# EAGLE board pcb_tema (EAGLE 9.7.0)
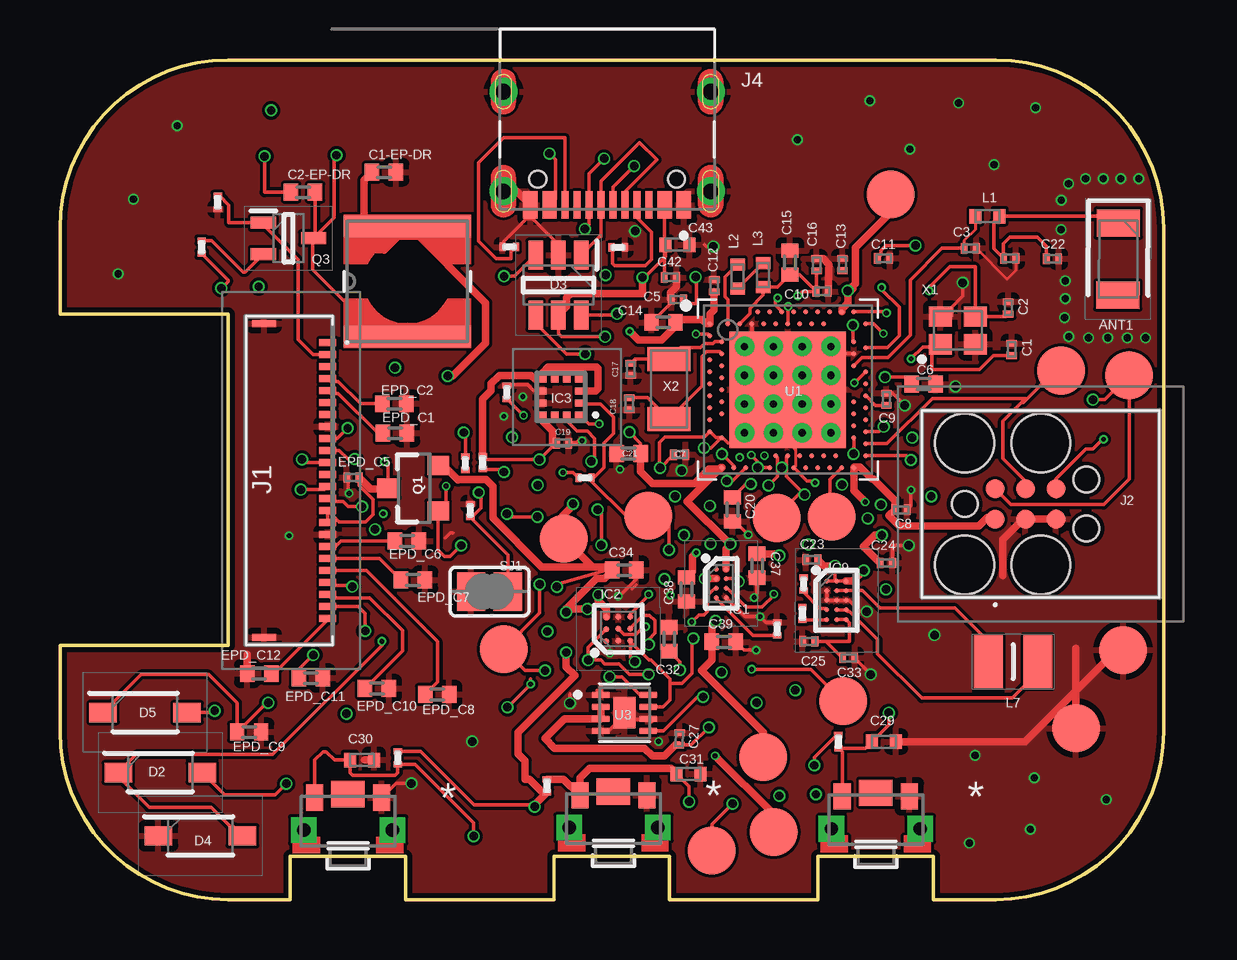
[diagram p0: board, top side]
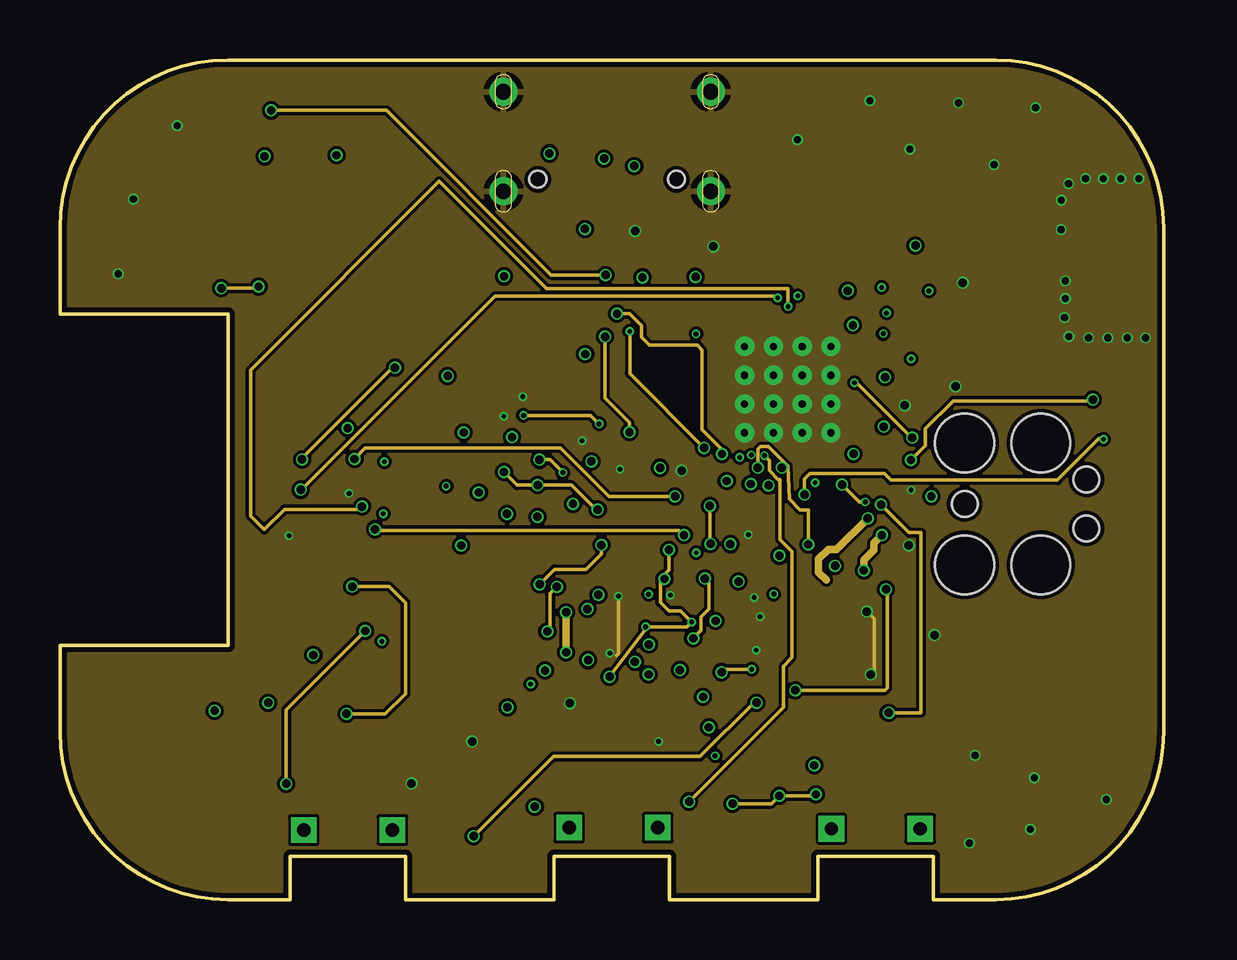
[diagram p1: board, inner layer Route2]
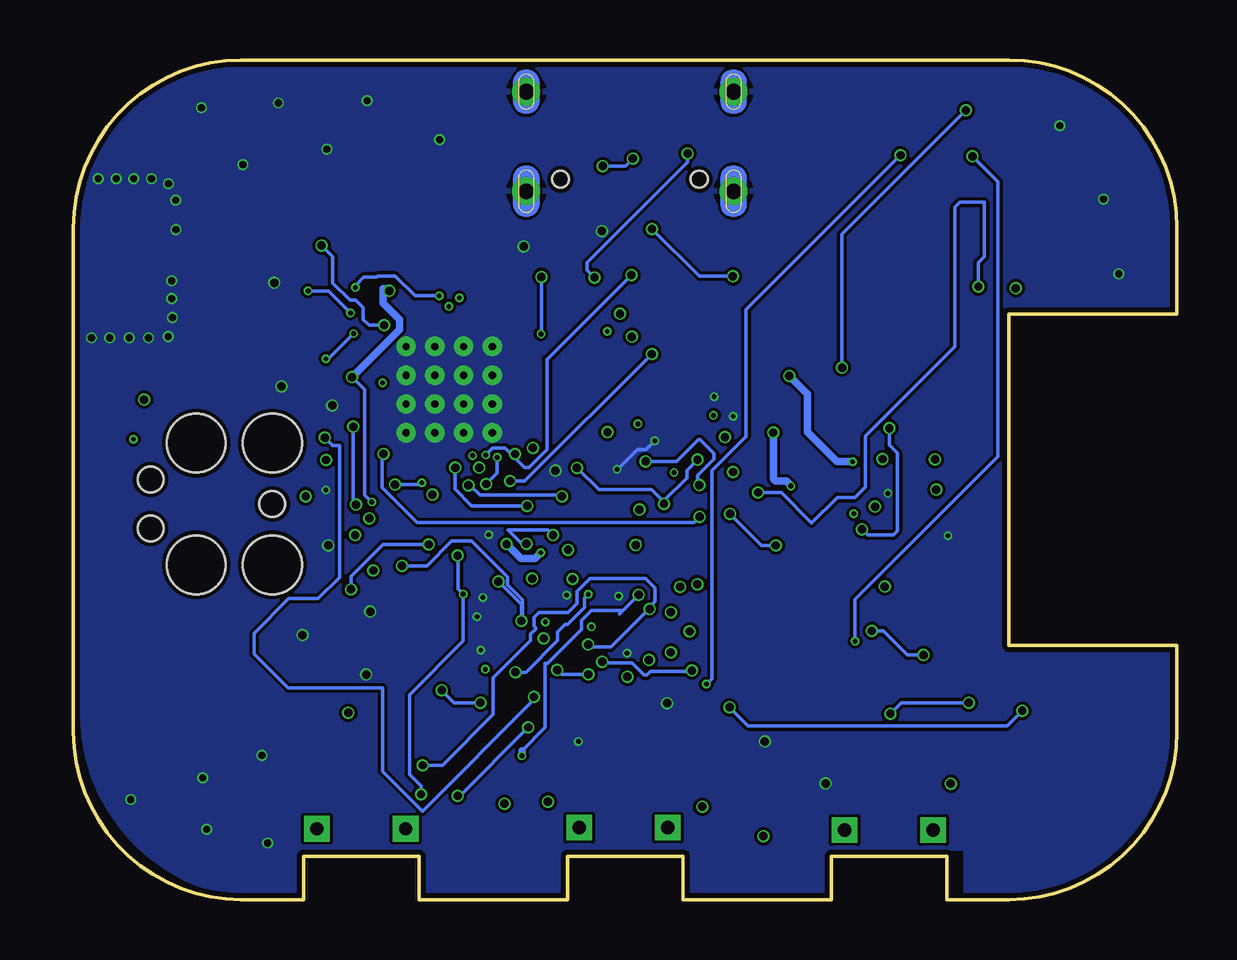
[diagram p2: board, bottom side, seen from below]

Size 46 x 35 mm. Coordinates in mm from the lower left corner, seen from the top.
Outline: 39,0 36.4,0 36.4,1.8 31.6,1.8 31.6,0 25.4,0 25.4,1.8 20.6,1.8 20.6,0 14.4,0 14.4,1.8 9.6,1.8 9.6,0 7,0 arc-90 0,7 0,10.6 7,10.6 7,24.4 0,24.4 0,28 arc-90 7,35 39,35 arc-90 46,28 46,7 arc-90 39,0
Copper layers (1+2*15+16): Top 0.035mm / dielectric 1.6mm / Route2 0.035mm / dielectric 0.15mm / Route15 0.035mm / dielectric 0.2mm / Bottom 0.035mm
Design rules "jlcpcb-2layers.dru *": minimum track width 5mil, minimum drill 0.3mm, track to track 5mil, track to pad 5mil, pad to pad 5mil, via to via 5mil, smd to smd 5mil, copper to edge 0.2mm, drill to drill 6mil, minimum pad ring 10mil, minimum via ring 0.075mm, stop-mask expansion 4mil, vias tented up to drill 0mil, thermal gap 10mil

## Footprints (pad centres in the part's own frame; a part is rotated, then mirrored left to right if it is on the bottom)
2450AT18B100E_ANTC3216X140N = smd 1.15 x 1.8: 1 -1.5,0; 2 1.5,0
NORDIC_NRF_3_RESC0201_L = smd 0.28 x 0.43: 1 -0.255,0; 2 0.255,0
PERFECT_0402_0402 = smd 0.6 x 0.7: 1 -0.5,0; 2 0.5,0
NORDIC_NRF_3_RESC0402_L = smd 0.5 x 0.6: 1 -0.5,0; 2 0.5,0
ESP32_C6_LIBRARY_5_SOD3716X135N = smd 1.15 x 0.8: 1 -1.75,0; 2 1.75,0
ESP32_C6_LIBRARY_3_SOT95P280X145-6N = smd 1.2 x 0.6: 1 -1.25,0.95; 2 -1.25,0; 3 -1.25,-0.95; 4 1.25,-0.95; 5 1.25,0; 6 1.25,0.95
BQ25180YBGR_BGA8C40P2X4_100X155X50 = smd 0.2 x 0.2: A1 -0.2,0.6; A2 0.2,0.6; B1 -0.2,0.2; B2 0.2,0.2; C1 -0.2,-0.2; C2 0.2,-0.2; D1 -0.2,-0.6; D2 0.2,-0.6
DRV2605YZFR_BGA9C50P3X3_144X144X62 = smd 0.25 x 0.25: A1 -0.5,0.5; A2 0,0.5; A3 0.5,0.5; B1 -0.5,0; B2 0,0; B3 0.5,0; C1 -0.5,-0.5; C2 0,-0.5; C3 0.5,-0.5
BMA423_BMA423 = smd 0.3 x 0.35: 1 -0.75,-0.775; 2 -0.25,-0.775; 3 0.25,-0.775; 4 0.75,-0.775; 7 0.75,0.775; 8 0.25,0.775; 9 -0.25,0.775; 10 -0.75,0.775 | smd 0.35 x 0.3: 5 0.775,-0.25; 6 0.775,0.25; 11 -0.775,0.25; 12 -0.775,-0.25
RT6160AWSC_BGA15C40P3X5_140X230X60 = smd 0.216 x 0.216: A1 -0.4,0.8; A2 0,0.8; A3 0.4,0.8; B1 -0.4,0.4; B2 0,0.4; B3 0.4,0.4; C1 -0.4,0; C2 0,0; C3 0.4,0; D1 -0.4,-0.4; D2 0,-0.4; D3 0.4,-0.4; E1 -0.4,-0.8; E2 0,-0.8; E3 0.4,-0.8
503480-2400_5034802400 = smd 0.3 x 0.7: 1 -5.75,1.525; 2 -5.25,1.525; 3 -4.75,1.525; 4 -4.25,1.525; 5 -3.75,1.525; 6 -3.25,1.525; 7 -2.75,1.525; 8 -2.25,1.525; 9 -1.75,1.525; 10 -1.25,1.525; 11 -0.75,1.525; 12 -0.25,1.525; 13 0.25,1.525; 14 0.75,1.525; 15 1.25,1.525; 16 1.75,1.525; 17 2.25,1.525; 18 2.75,1.525; 19 3.25,1.525; 20 3.75,1.525; 21 4.25,1.525; 22 4.75,1.525; 23 5.25,1.525; 24 5.75,1.525 | smd 0.3 x 1: MP1 -6.54,-1.125; MP2 6.54,-1.125
TC2030-IDC_TC2030IDC = smd 0.783 x 0.783: 1 -0.953,-0.635; 2 -0.953,0.635; 3 0.317,-0.635; 4 0.317,0.635; 5 1.588,-0.635; 6 1.588,0.635 | hole 2.451: -2.223,-2.54; -2.223,2.54; 0.952,-2.54; 0.952,2.54 | hole 1.067: -2.223,0; 2.857,-1.016; 2.857,1.016
KH-TYPE-C-16P_KINGHELM_KH-TYPE-C-16P = smd 0.6 x 1.15: A1_B12 -3.2,4.725; A4_B9 -2.4,4.725; A9_B4 2.4,4.725; A12_B1 3.2,4.725 | smd 0.3 x 1.15: A5 -1.25,4.725; A6 -0.25,4.725; A7 0.25,4.725; A8 1.25,4.725; B5 1.75,4.725; B6 0.75,4.725; B7 -0.75,4.725; B8 -1.75,4.725 | drill 0.65 pad 1.05: SH1 -4.32,0; SH2 4.32,0; SH3 -4.32,4.15; SH4 4.32,4.15 | hole 0.7: -2.89,3.65; 2.89,3.65
NORDIC_NRF_2_RESC0402_L = smd 0.5 x 0.6: 1 -0.5,0; 2 0.5,0
ESP32_C6_LIBRARY_2_IND_4828-WE-TPC_WRE = smd 0.9 x 5.3: 1 -2.286,0; 2 2.286,0
MLP2016SR47MT0S1_INDC2016X100N = smd 1.2 x 2.2: 1 -1.028,0; 2 1.028,0
ESP32_C6_LIBRARY_4_ESP32_C6_LIBRARY_4_ESP32_C6_LIBRARY_4_ESP32_C6_LIBRARY_4_ESP32_WROVER_SPARKFUN-DISCRETESEMI_SOT23-3 = smd 0.8 x 0.9: 1 -0.95,-1; 2 0.95,-1; 3 0,1.1
ESP32_C6_LIBRARY_6_SOT65P210X110-3N = smd 1.05 x 0.5: 1 -1.05,0.65; 2 -1.05,-0.65; 3 1.05,0
CPF0201D7K68C1_0201 = smd 0.35 x 0.25: 1 0,0.275; 2 0,-0.275
ESP32_C6_LIBRARY_7_JUMPER_SJ = smd 1.168 x 1.6: 1 -0.762,0; 2 0.762,0
2025-10-22_07-23-44_LIBRARY_SW_EVP-AKE31A_PAN = smd 0.711 x 1.092: 1 -1.4,-0.972; 2 1.4,-0.972 | drill 0.559 pad 0.914 square: 3 -1.848,0.381; 4 1.848,0.381 | smd 1.397 x 1.092: 5 0,-1.124
HECTOR_WATCH_1_TP20R = smd 2 x 2: TP 0,0
NORDIC_NRF_4_AQFN50P700X700X85_HS-74N = smd 4.85 x 4.85: P$74 0,0 | drill 0.3 pad 0.6: P$75 -1.8,1.8; P$76 -0.6,1.8; P$77 0.6,1.8; P$78 1.8,1.8; P$79 -1.8,0.6; P$80 -0.6,0.6; P$81 0.6,0.6; P$82 1.8,0.6; P$83 -1.8,-0.6; P$84 -0.6,-0.6; P$85 0.6,-0.6; P$86 1.8,-0.6; P$87 -1.8,-1.8; P$88 -0.6,-1.8; P$89 0.6,-1.8; P$90 1.8,-1.8 | smd 0.2 x 0.2: P$A8 -1.25,3.25; P$A10 -0.75,3.25; P$A12 -0.25,3.25; P$A14 0.25,3.25; P$A16 0.75,3.25; P$A18 1.25,3.25; P$A20 1.75,3.25; P$A22 2.25,3.25; P$A23 2.75,3.25; P$AA24 3.25,-2.25; P$AB2 -2.75,-2.5; P$AC5 -2,-2.75; P$AC9 -1,-2.75; P$AC11 -0.5,-2.75; P$AC13 0,-2.75; P$AC15 0.5,-2.75; P$AC17 1,-2.75; P$AC19 1.5,-2.75; P$AC21 2,-2.75; P$AC24 3.25,-2.75; P$AD2 -2.75,-3.25; P$AD4 -2.25,-3.25; P$AD6 -1.75,-3.25; P$AD8 -1.25,-3.25; P$AD10 -0.75,-3.25; P$AD12 -0.25,-3.25; P$AD14 0.25,-3.25; P$AD16 0.75,-3.25; P$AD18 1.25,-3.25; P$AD20 1.75,-3.25; P$AD22 2.25,-3.25; P$AD23 2.75,-3.25; P$B1 -3.25,2.75; P$B3 -2.5,2.75; P$B5 -2,2.75; P$B7 -1.5,2.75; P$B9 -1,2.75; P$B11 -0.5,2.75; P$B13 0,2.75; P$B15 0.5,2.75; P$B17 1,2.75; P$B19 1.5,2.75; P$B24 3.25,2.75; P$C1 -3.25,2.25; P$D2 -2.75,2; P$D23 2.75,2; P$E24 3.25,1.75; P$F2 -2.75,1.5; P$F23 2.75,1.5; P$G1 -3.25,1.25; P$H2 -2.75,1; P$H23 2.75,1; P$J1 -3.25,0.75; P$J24 3.25,0.75; P$K2 -2.75,0.5; P$L1 -3.25,0.25; P$L24 3.25,0.25; P$M2 -2.75,0; P$N1 -3.25,-0.25; P$N24 3.25,-0.25; P$P2 -2.75,-0.5; P$P23 2.75,-0.5; P$R1 -3.25,-0.75; P$R24 3.25,-0.75; P$T2 -2.75,-1; P$T23 2.75,-1; P$U1 -3.25,-1.25; P$U24 3.25,-1.25; P$V23 2.75,-1.5; P$W1 -3.25,-1.75; P$W24 3.25,-1.75; P$Y2 -2.75,-2; P$Y23 2.75,-2
ESP32_C6_LIBRARY_SON50P200X200X80-9N = smd 0.76 x 0.27: 1 -0.985,0.75; 2 -0.985,0.25; 3 -0.985,-0.25; 4 -0.985,-0.75; 5 0.985,-0.75; 6 0.985,-0.25; 7 0.985,0.25; 8 0.985,0.75 | smd 0.9 x 1.3: 9 0,0
NORDIC_NRF_BT-XTAL_2016_N = smd 0.95 x 0.85: 1 -0.725,-0.575; 2 0.725,-0.575; 3 0.725,0.575; 4 -0.725,0.575
NORDIC_NRF_1_XTAL_3215_N = smd 1 x 1.8: 1 -1.25,0; 2 1.25,0

## Placement (x,y rotation side)
ANT1  2450AT18B100E  [2450AT18B100E_ANTC3216X140N]  44.11,26.7 269.7 top
C1  12pF  [NORDIC_NRF_3_RESC0201_L]  39.67,22.93 90 top
C1-EP-DR  10uF  [PERFECT_0402_0402]  13.5,30.32 0 top
C2  12pF  [NORDIC_NRF_3_RESC0201_L]  39.53,24.66 90 top
C2-EP-DR  4.7uF/25V  [PERFECT_0402_0402]  10.13,29.49 0 top
C3  1pF  [NORDIC_NRF_3_RESC0201_L]  37.94,27.15 0 top
C4  1pF  [NORDIC_NRF_3_RESC0201_L]  39.59,26.73 0 top
C5  100nF  [NORDIC_NRF_3_RESC0201_L]  25.74,25.01 180 top
C6  4.7µF  [PERFECT_0402_0402]  36,21.5 0 top
C7  100nF  [NORDIC_NRF_3_RESC0201_L]  25.82,18.55 0 top
C8  100nF  [NORDIC_NRF_3_RESC0201_L]  35.06,16.24 0 top
C9  820pF  [NORDIC_NRF_3_RESC0201_L]  34.45,20.85 90 top
C10  N.C.  [NORDIC_NRF_3_RESC0201_L]  31.77,25.35 0 top
C11  100pF  [NORDIC_NRF_3_RESC0201_L]  34.33,26.73 0 top
C12  100nF  [NORDIC_NRF_3_RESC0201_L]  27.27,25.59 90 top
C13  N.C.  [NORDIC_NRF_3_RESC0201_L]  32.62,26.47 90 top
C14  4.7µF  [PERFECT_0402_0402]  25.16,24.06 180 top
C15  1.0µF  [PERFECT_0402_0402]  30.43,26.55 90 top
C16  47nF  [NORDIC_NRF_3_RESC0201_L]  31.54,26.46 90 top
C17  12pF  [NORDIC_NRF_3_RESC0201_L]  23.79,22.1 90 top
C18  12pF  [NORDIC_NRF_3_RESC0201_L]  23.73,20.67 90 top
C19  100nF  [NORDIC_NRF_3_RESC0201_L]  20.95,19.03 0 top
C20  4.7µF  [PERFECT_0402_0402]  28.03,16.26 269.8 top
C21  4.7µF  [PERFECT_0402_0402]  23.7,18.59 180 top
C22  N.C.  [NORDIC_NRF_3_RESC0201_L]  41.37,26.71 0 top
C23  0.1uF  [NORDIC_NRF_3_RESC0201_L]  31.34,14.17 0 top
C24  10uF  [NORDIC_NRF_3_RESC0201_L]  34.44,14.03 0 top
C25  22uF  [NORDIC_NRF_3_RESC0201_L]  31.21,10.76 179.7 top
C27  0.1uF  [NORDIC_NRF_3_RESC0201_L]  25.82,6.7 88.1 top
C29  1uF  [NORDIC_NRF_3_RESC0402_L]  34.35,6.58 180 top
C30  1uF  [NORDIC_NRF_3_RESC0402_L]  12.58,5.82 180 top
C31  1uF  [NORDIC_NRF_3_RESC0402_L]  26.2,5.23 180 top
C32  1uF  [PERFECT_0402_0402]  25.39,10.86 90 top
C33  22uF  [NORDIC_NRF_3_RESC0201_L]  32.88,10.07 0 top
C34  0.1uF  [PERFECT_0402_0402]  23.51,13.73 0 top
C37  1uF  [PERFECT_0402_0402]  29.06,13.91 90.1 top
C38  1uF  [PERFECT_0402_0402]  26.11,12.93 90 top
C39  10uF  [PERFECT_0402_0402]  27.67,10.75 0 top
C42  0.1uF  [NORDIC_NRF_3_RESC0201_L]  25.45,25.93 0 top
C43  4.7uF  [NORDIC_NRF_3_RESC0402_L]  25.74,27.29 0 top
D2  MBR0530  [ESP32_C6_LIBRARY_5_SOD3716X135N]  4.18,5.29 0 top
D3  USBLC6-2SC6Y  [ESP32_C6_LIBRARY_3_SOT95P280X145-6N]  20.78,25.61 270 top
D4  MBR0530  [ESP32_C6_LIBRARY_5_SOD3716X135N]  5.85,2.66 0 top
D5  MBR0530  [ESP32_C6_LIBRARY_5_SOD3716X135N]  3.55,7.8 0 top
EPD_C1  1uF/50V  [PERFECT_0402_0402]  13.96,19.44 0 top
EPD_C2  1uF/50V  [PERFECT_0402_0402]  13.94,20.67 0 top
EPD_C5  0.1uF/50V  [NORDIC_NRF_3_RESC0201_L]  12.21,17.59 0 top
EPD_C6  1uF/50V  [PERFECT_0402_0402]  14.46,14.95 0 top
EPD_C7  1uF/50V  [PERFECT_0402_0402]  14.72,13.32 0 top
EPD_C8  1uF/50V  [PERFECT_0402_0402]  15.73,8.55 0 top
EPD_C9  1uF/50V  [PERFECT_0402_0402]  7.88,6.99 0 top
EPD_C10  1uF/50V  [PERFECT_0402_0402]  13.21,8.81 0 top
EPD_C11  1uF/50V  [PERFECT_0402_0402]  10.46,9.23 0 top
EPD_C12  1uF/50V  [PERFECT_0402_0402]  8.31,9.42 180 top
IC1  BQ25180YBGR  [BQ25180YBGR_BGA8C40P2X4_100X155X50]  27.56,13.18 0 top
IC2  DRV2605YZFR  [DRV2605YZFR_BGA9C50P3X3_144X144X62]  23.27,11.28 90.4 top
IC3  BMA421  [BMA423_BMA423]  20.88,20.95 90 top
IC9  RT6160AWSC  [RT6160AWSC_BGA15C40P3X5_140X230X60]  32.37,12.48 0 top
J1  503480-2400  [503480-2400_5034802400]  9.63,17.47 270 top
J2  TC2030-IDC  [TC2030-IDC_TC2030IDC]  39.93,16.49 0 top
J4  KH-TYPE-C-16P  [KH-TYPE-C-16P_KINGHELM_KH-TYPE-C-16P]  22.81,33.68 180 top
L1  3.9nH  [NORDIC_NRF_2_RESC0402_L]  38.66,28.48 0 top
L2  10µH  [NORDIC_NRF_2_RESC0402_L]  28.25,25.98 90 top
L3  15nH  [NORDIC_NRF_2_RESC0402_L]  29.31,26.03 90 top
L5  68uH  [ESP32_C6_LIBRARY_2_IND_4828-WE-TPC_WRE]  14.48,25.77 90 top
L7  FTC252012SR47MBCA  [MLP2016SR47MT0S1_INDC2016X100N]  39.73,9.92 0 top
Q1  20V/4.2A/52mΩ/1.4W  [ESP32_C6_LIBRARY_4_ESP32_C6_LIBRARY_4_ESP32_C6_LIBRARY_4_ESP32_C6_LIBRARY_4_ESP32_WROVER_SPARKFUN-DISCRETESEMI_SOT23-3]  14.77,17.15 90 top
Q3  SI1308EDL-T1-GE3  [ESP32_C6_LIBRARY_6_SOT65P210X110-3N]  9.53,27.56 0 top
R1_EP_DR  0.47  [CPF0201D7K68C1_0201]  5.91,27.19 180 top
R1_USB  5K1  [CPF0201D7K68C1_0201]  23.27,27.18 270 top
R2  0  [CPF0201D7K68C1_0201]  30.95,11.93 0 top
R2_EP_DR  10K  [CPF0201D7K68C1_0201]  6.58,29.07 180 top
R2_USB  5K1  [CPF0201D7K68C1_0201]  18.73,27.2 270 top
R3  0  [CPF0201D7K68C1_0201]  18.62,21.15 0 top
R4  0  [CPF0201D7K68C1_0201]  31,13.16 0 top
R5  10k  [CPF0201D7K68C1_0201]  14.08,5.9 180 top
R7  10k  [CPF0201D7K68C1_0201]  32.45,6.58 180.1 top
R8  10k  [CPF0201D7K68C1_0201]  20.3,4.74 0 top
R9  10K  [CPF0201D7K68C1_0201]  29.9,11.28 0 top
R17  3K3  [CPF0201D7K68C1_0201]  17.62,18.22 0 top
R18  3K3  [CPF0201D7K68C1_0201]  21.88,17.59 91 top
R_PWR_EPD  10K  [CPF0201D7K68C1_0201]  16.9,18.19 0 top
R_TYPE_SEL  2.2  [CPF0201D7K68C1_0201]  17.11,16.22 0 top
SJ1  [ESP32_C6_LIBRARY_7_JUMPER_SJ]  17.9,12.84 0 top
SW_DN  2025-10-22_07-23-44_LIBRARY_EVP-AKE31ASW_EVP-AKE31A_PAN  [2025-10-22_07-23-44_LIBRARY_SW_EVP-AKE31A_PAN]  34,3.33 180 top
SW_ENT  2025-10-22_07-23-44_LIBRARY_EVP-AKE31ASW_EVP-AKE31A_PAN  [2025-10-22_07-23-44_LIBRARY_SW_EVP-AKE31A_PAN]  23.07,3.37 180 top
SW_UP  2025-10-22_07-23-44_LIBRARY_EVP-AKE31ASW_EVP-AKE31A_PAN  [2025-10-22_07-23-44_LIBRARY_SW_EVP-AKE31A_PAN]  12.01,3.27 180 top
TP_3.3V  HECTOR_WATCH_1_TPTP20R  [HECTOR_WATCH_1_TP20R]  21.01,15.04 0 top
TP_3V3  HECTOR_WATCH_1_TPTP20R  [HECTOR_WATCH_1_TP20R]  34.63,29.39 0 top
TP_BAT_GND  HECTOR_WATCH_1_TPTP20R  [HECTOR_WATCH_1_TP20R]  42.35,7.14 0 top
TP_GND  HECTOR_WATCH_1_TPTP20R  [HECTOR_WATCH_1_TP20R]  44.32,10.4 0 top
TP_ON  HECTOR_WATCH_1_TPTP20R  [HECTOR_WATCH_1_TP20R]  32.64,8.27 0 top
TP_OP  HECTOR_WATCH_1_TPTP20R  [HECTOR_WATCH_1_TP20R]  29.75,2.81 0 top
TP_RESET  HECTOR_WATCH_1_TPTP20R  [HECTOR_WATCH_1_TP20R]  29.88,15.91 0 top
TP_SCL  HECTOR_WATCH_1_TPTP20R  [HECTOR_WATCH_1_TP20R]  18.49,10.44 0 top
TP_SDA  HECTOR_WATCH_1_TPTP20R  [HECTOR_WATCH_1_TP20R]  24.52,16.01 0 top
TP_SWDCLK  HECTOR_WATCH_1_TPTP20R  [HECTOR_WATCH_1_TP20R]  41.72,22.05 0 top
TP_SWDIO  HECTOR_WATCH_1_TPTP20R  [HECTOR_WATCH_1_TP20R]  44.56,21.86 0 top
TP_SWO  HECTOR_WATCH_1_TPTP20R  [HECTOR_WATCH_1_TP20R]  32.17,15.95 0 top
TP_VBAT  HECTOR_WATCH_1_TPTP20R  [HECTOR_WATCH_1_TP20R]  27.17,2.04 0 top
TP_VREG  HECTOR_WATCH_1_TPTP20R  [HECTOR_WATCH_1_TP20R]  29.32,5.94 0 top
U1  NRF52840_QF  [NORDIC_NRF_4_AQFN50P700X700X85_HS-74N]  30.34,21.26 0 top
U3  MAX17048G+T10  [ESP32_C6_LIBRARY_SON50P200X200X80-9N]  23.53,7.79 0 top
X1  32MHz  [NORDIC_NRF_BT-XTAL_2016_N]  37.43,23.73 0 top
X2  32.768kHz  [NORDIC_NRF_1_XTAL_3215_N]  25.38,21.29 270 top

## Library data of the parts
ANT1 = InkTime_v5; ARROW_PART_NUMBER: 2450AT18B100E; ARROW_PRICE-STOCK: https://www.arrow.com/en/products/2450at18b100e/johanson-dielectrics?utm_currency=USD&region=nac; DESCRIPTION: Antennas 2.45GHz ANTENNA; HEIGHT: 1.4mm; MANUFACTURER_NAME: JOHANSON TECHNOLOGY; MANUFACTURER_PART_NUMBER: 2450AT18B100E; MOUSER_PART_NUMBER: 609-2450AT18B100E; MOUSER_PRICE-STOCK: https://www.mouser.co.uk/ProductDetail/Johanson-Technology/2450AT18B100E?qs=yCnrNFeXz%252Bh5MFsFIXGZGA%3D%3D
C1 C1-EP-DR C2 C2-EP-DR C3-C25 C27 C29-C34 C37-C39 C42 C43 EPD_C1 EPD_C2 EPD_C5-EPD_C12 L1-L3 R1_EP_DR R1_USB R2 R2_EP_DR R2_USB R3-R5 R7-R9 R17 R18 R_PWR_EPD R_TYPE_SEL SJ1 TP_3.3V TP_3V3 TP_BAT_GND TP_GND TP_ON TP_OP TP_RESET TP_SCL TP_SDA TP_SWDCLK TP_SWDIO TP_SWO TP_VBAT TP_VREG U1 X1 X2 = InkTime_v5
D2 D4 D5 = InkTime_v5; AVAILABILITY: In Stock; CHECK_PRICES: https://www.snapeda.com/parts/MBR0530/Onsemi/view-part/?ref=eda; DESCRIPTION: Diode Schottky 30 V 500mA Surface Mount SOD-123; MF: ON Semiconductor; MP: MBR0530; PACKAGE: SOD-123-2 ON Semiconductor; PRICE: None; PURCHASE-URL: https://www.snapeda.com/api/url_track_click_mouser/?unipart_id=179458&manufacturer=ON Semiconductor&part_name=MBR0530&search_term=None; SNAPEDA_LINK: https://www.snapeda.com/parts/MBR0530/Onsemi/view-part/?ref=snap
D3 = InkTime_v5; AVAILABILITY: In Stock; CHECK_PRICES: https://www.snapeda.com/parts/USBLC6-2SC6Y/STMicroelectronics/view-part/?ref=eda; DESCRIPTION: 17V Clamp 5A (8/20µs) Ipp Tvs Diode Surface Mount SOT-23-6; MF: STMicroelectronics; MP: USBLC6-2SC6Y; PACKAGE: SOT-23-6 STMicroelectronics; PRICE: None; SNAPEDA_LINK: https://www.snapeda.com/parts/USBLC6-2SC6Y/STMicroelectronics/view-part/?ref=snap
IC1 = InkTime_v5; ARROW_PART_NUMBER: BQ25180YBGR; ARROW_PRICE-STOCK: https://www.arrow.com/en/products/bq25180ybgr/texas-instruments?utm_currency=USD&region=nac; DESCRIPTION: Charger IC Lithium Ion/Polymer, Lithium Iron Phosphate 8-DSBGA (1.6x1.1); HEIGHT: 0.5mm; MANUFACTURER_NAME: Texas Instruments; MANUFACTURER_PART_NUMBER: BQ25180YBGR; MOUSER_PART_NUMBER: 595-BQ25180YBGR; MOUSER_PRICE-STOCK: https://www.mouser.co.uk/ProductDetail/Texas-Instruments/BQ25180YBGR?qs=doiCPypUmgEWjAK%252BJAX6Tw%3D%3D
IC2 = InkTime_v5; ARROW_PART_NUMBER: DRV2605YZFR; ARROW_PRICE-STOCK: https://www.arrow.com/en/products/drv2605yzfr/texas-instruments?region=nac; DESCRIPTION: Haptic Driver for ERM/LRA with Built-In Library and Smart Loop Architecture; HEIGHT: 0.625mm; MANUFACTURER_NAME: Texas Instruments; MANUFACTURER_PART_NUMBER: DRV2605YZFR
IC3 = InkTime_v5; ARROW_PART_NUMBER: BMA423; ARROW_PRICE-STOCK: https://www.arrow.com/en/products/bma423/bosch; DESCRIPTION: Accelerometers Triaxial low-g 12bit Acceleration Sensor; HEIGHT: 1mm; MANUFACTURER_NAME: BOSCH; MANUFACTURER_PART_NUMBER: BMA423; MOUSER_PART_NUMBER: 262-BMA423; MOUSER_PRICE-STOCK: https://www.mouser.co.uk/ProductDetail/Bosch-Sensortec/BMA423?qs=HXFqYaX1Q2xC%252BSgeGoX3mg%3D%3D
IC9 = InkTime_v5; DESCRIPTION: Buck-Boost Regulator Positive Output Step-Up/Step-Down I2C DC-DC Controller IC 15-WL-CSP (BSC) (1.4x2.3); HEIGHT: 0.6mm; MANUFACTURER_NAME: RICHTEK; MANUFACTURER_PART_NUMBER: RT6160AWSC; MOUSER_PART_NUMBER: 835-RT6160AWSC; MOUSER_PRICE-STOCK: https://www.mouser.co.uk/ProductDetail/Richtek/RT6160AWSC?qs=amGC7iS6iy%2FLd9PSoixZXQ%3D%3D
J1 = InkTime_v5; DESCRIPTION: FFC & FPC Connectors 0.5mm FPC RA SMT Dual Contact 24Ckt; HEIGHT: 1.87mm; MANUFACTURER_NAME: Molex; MANUFACTURER_PART_NUMBER: 503480-2400; MOUSER_PART_NUMBER: 538-503480-2400; MOUSER_PRICE-STOCK: https://www.mouser.co.uk/ProductDetail/Molex/503480-2400?qs=OAhjpuo3Vu7efIoxFh9AOw%3D%3D
J2 = InkTime_v5; DESCRIPTION: CABLE ADAPTER 6 POS; HEIGHT: 19mm; MANUFACTURER_NAME: Tag Connect; MANUFACTURER_PART_NUMBER: TC2030-IDC
J4 = InkTime_v5; AVAILABILITY: Not in stock; CHECK_PRICES: https://www.snapeda.com/parts/KH-TYPE-C-16P/Kinghelm/view-part/?ref=eda; MF: kinghelm; MP: KH-TYPE-C-16P; PACKAGE: None; PRICE: None; SNAPEDA_LINK: https://www.snapeda.com/parts/KH-TYPE-C-16P/Kinghelm/view-part/?ref=snap
L5 = InkTime_v5; COPYRIGHT: Copyright (C) 2024 Ultra Librarian. All rights reserved.; MANUFACTURER_PART_NUMBER: 744043680; MFR_NAME: Wurth Electronics
L7 = InkTime_v5; DESCRIPTION: SMD / SMT Inductors (Coils), L=0.47?H, L x W x T :; HEIGHT: 1mm; JLCPCB: https://jlcpcb.com/partdetail/6763488-FTC252012SR47MBCA/C5832368; MANUFACTURER_NAME: TDK; MANUFACTURER_PART_NUMBER: FTC252012SR47MBCA
Q1 = InkTime_v5; PROD_ID: TRAN-14388
Q3 = InkTime_v5; AVAILABILITY: In Stock; CHECK_PRICES: https://www.snapeda.com/parts/SI1308EDL-T1-GE3/Vishay+Siliconix/view-part/?ref=eda; DESCRIPTION: Si1308EDL-T1-GE3 N-channel MOSFET Transistor, 1.5 A, 30 V, 3-Pin SC-70 | Siliconix / Vishay SI1308EDL-T1-GE3; MF: Vishay Siliconix; MP: SI1308EDL-T1-GE3; PACKAGE: SOT-323 Vishay Semiconductor; PRICE: None; PURCHASE-URL: https://www.snapeda.com/api/url_track_click_mouser/?unipart_id=274603&manufacturer=Vishay Siliconix&part_name=SI1308EDL-T1-GE3&search_term=None; SNAPEDA_LINK: https://www.snapeda.com/parts/SI1308EDL-T1-GE3/Vishay+Siliconix/view-part/?ref=snap
SW_DN SW_ENT SW_UP = InkTime_v5; COPYRIGHT: Copyright (C) 2025 Ultra Librarian. All rights reserved.; DIGI-KEY_PART_NUMBER_1: P123437TR-ND; DIGI-KEY_PART_NUMBER_2: P123437CT-ND; DIGI-KEY_PART_NUMBER_3: P123437DKR-ND; MANUFACTURER_NAME: Panasonic; MANUFACTURER_PART_NUMBER: EVP-AKE31A
U3 = InkTime_v5; AVAILABILITY: In Stock; CHECK_PRICES: https://www.snapeda.com/parts/MAX17048G+T10/Analog+Devices/view-part/?ref=eda; DESCRIPTION: 3µA 1-Cell/2-Cell Fuel Gauge with ModelGauge; MF: Analog Devices; MP: MAX17048G+T10; PACKAGE: TDFN-8 Maxim; PRICE: None; PURCHASE-URL: https://www.snapeda.com/api/url_track_click_mouser/?unipart_id=329239&manufacturer=Analog Devices&part_name=MAX17048G+T10&search_term=None; SNAPEDA_LINK: https://www.snapeda.com/parts/MAX17048G+T10/Analog+Devices/view-part/?ref=snap

## Nets
3V3: C6.1 C7.1 C8.1 C12.1 C14.1 C19.1 C34.1 IC2.C2 IC3.3 IC3.7 IC3.10 J2.1 Q1.2 R5.2 R7.2 R8.2 R17.1 R18.1 TP_3.3V.TP TP_3V3.TP U1.P$A22 U1.P$AD14 U1.P$AD23 U1.P$B1 U1.P$W1 U1.P$Y2
ALERT: U1.P$J24 U3.5
D+: D3.4 U1.P$AD6
D-: D3.6 U1.P$AD4
DEC4_6: C10.1 C15.1 C16.1 L3.1 U1.P$B5 U1.P$E24
DN: D3.1 J4.A7 J4.B7
DP: D3.3 J4.A6 J4.B6
EPD_3V3: C1-EP-DR.1 EPD_C5.2 J1.15 J1.16 L5.2 Q1.3
EPD_BUSY: J1.9 U1.P$AD12
EPD_CS: J1.12
EPD_DC: J1.11 U1.P$AD10
EPD_RST: J1.10 U1.P$AC11
GDR: J1.2 Q3.1 R2_EP_DR.2
GND: C1-EP-DR.2 C1.2 C2.2 C3.2 C4.2 C5.2 C6.2 C7.2 C8.2 C9.2 C10.2 C11.2 C12.2 C13.2 C14.2 C15.2 C16.2 C17.1 C18.1 C19.2 C20.2 C21.2 C22.2 C23.1 C24.2 C25.2 C27.2 C29.1 C30.1 C31.1 C32.2 C33.2 C34.2 C37.1 C38.1 C39.2 C42.2 C43.2 D3.2 D4.1 EPD_C1.2 EPD_C2.2 EPD_C5.1 EPD_C6.2 EPD_C7.2 EPD_C8.2 EPD_C9.2 EPD_C10.2 EPD_C11.2 EPD_C12.2 IC1.D2 IC2.B1 IC2.B3 IC3.8 IC3.9 IC9.B1 IC9.C1 IC9.C2 IC9.C3 J1.8 J1.17 J1.MP1 J1.MP2 J2.3 J2.5 J4.A1_B12 J4.A12_B1 J4.SH1 J4.SH2 J4.SH3 J4.SH4 R1_USB.1 R2_EP_DR.1 R2_USB.2 R3.1 R9.1 R_TYPE_SEL.1 SJ1.1 SW_DN.1 SW_ENT.1 SW_UP.1 TP_BAT_GND.TP TP_GND.TP U1.P$74 U1.P$75 U1.P$76 U1.P$77 U1.P$78 U1.P$79 U1.P$80 U1.P$81 U1.P$82 U1.P$83 U1.P$84 U1.P$85 U1.P$86 U1.P$87 U1.P$88 U1.P$89 U1.P$90 U1.P$B7 U1.P$F23 U3.1 U3.4 U3.6 U3.9 X1.2 X1.4
HAPTIC_EN/1.4C: IC2.A1
IMU_INT1: IC3.5
IMU_INT2: IC3.6
LX1: IC9.B2 IC9.B3 L7.1
LX2: IC9.D2 IC9.D3 L7.2
MOSI: J1.14 U1.P$B13
N$1: R4.1
N$2: IC9.D1 R4.2
N$4: IC9.E1 R2.2
N$5: C25.1 C33.1 IC9.E2 IC9.E3
N$6: R2.1
N$7: IC1.D1 R9.2
N$8: C5.1 U1.P$C1
N$9: L2.2 U1.P$B3
N$10: IC3.1 R3.2
N$11: L2.1 L3.2
N$12: U1.P$G1
N$13: U1.P$H2
N$14: U1.P$J1
N$15: U1.P$K2
N$16: U1.P$L1
N$17: U1.P$M2
N$18: U1.P$N1
N$19: U1.P$P2
N$20: U1.P$R1
N$21: U1.P$T2
N$22: U1.P$U1
N$23: C11.1 U1.P$D23
N$24: C13.1
N$25: U1.P$AB2
N$26: C20.1 U1.P$AC5
N$27: C9.1 U1.P$N24
N$29: C2.1 U1.P$A23 X1.3
N$30: C1.1 U1.P$B24 X1.1
N$31: C3.1 L1.1 U1.P$H23
N$32: C2-EP-DR.1 D2.1 D4.2
N$33: C2-EP-DR.2 D5.2 L5.1 Q3.3
N$34: Q3.2 R1_EP_DR.2
N$35: R1_EP_DR.1 R_TYPE_SEL.2 SJ1.2
N$36: R_PWR_EPD.2
N$37: EPD_C1.1 J1.5
N$38: C32.1 IC2.A2
N$39: EPD_C6.1 J1.18
N$40: EPD_C7.1 J1.19
N$41: EPD_C2.1 J1.4
N$42: EPD_C8.1 J1.20
N$43: J4.A5 R1_USB.2
N$44: EPD_C10.1 J1.22
N$46: EPD_C12.1 J1.24
N$50: J4.B5 R2_USB.1
OUT+: IC2.A3 TP_OP.TP
OUT-: IC2.C3 TP_ON.TP
P0.00/XL1: C17.2 U1.P$D2 X2.1
P0.01/XL2: C18.2 U1.P$F2 X2.2
P0.09: U1.P$L24
P0.13: C30.2 R5.1 SW_UP.2 U1.P$AD8
P0.14: C31.2 R8.1 SW_ENT.2 U1.P$AC9
P0.19: U1.P$AC15
P0.20: U1.P$AD16
P0.21: U1.P$AC17
P0.22: U1.P$AD18
P0.23: U1.P$AC19
P0.24: U1.P$AD20
P0.25: U1.P$AC21
P0.28: U1.P$B11
P0.29: U1.P$A10
P0.30: U1.P$B9
P0.31: U1.P$A8
P1.01: Q1.1 R_PWR_EPD.1 U1.P$Y23
P1.02: C29.2 R7.1 SW_DN.2 U1.P$W24
P1.03: U1.P$V23
P1.04: U1.P$U24
P1.05: U1.P$T23
P1.06: U1.P$R24
P1.07: U1.P$P23
P1.10: U1.P$A20
P1.11: U1.P$B19
P1.12: U1.P$B17
P1.13: U1.P$A16
P1.14: U1.P$B15
P1.15: U1.P$A14
PMIC_INT: IC1.A1
PREVGH: D5.1 EPD_C9.1 J1.21
PREVGL: D2.2 EPD_C11.1 J1.23
RESE: J1.3
RESET: J2.6 TP_RESET.TP U1.P$AC13
RF: ANT1.1 C4.1 C22.1 L1.2
SCK: J1.13 U1.P$A12
SCL: IC1.B1 IC2.C1 IC3.12 R17.2 TP_SCL.TP U3.7
SDA: IC1.C1 IC2.B2 IC3.2 R18.2 TP_SDA.TP U3.8
SWDCLK: J2.4 TP_SWDCLK.TP U1.P$AA24
SWDIO: J2.2 TP_SWDIO.TP U1.P$AC24
SWO: TP_SWO.TP U1.P$AD22
VBAT: C27.1 C37.2 IC1.C2 TP_VBAT.TP U3.2 U3.3
VBUS: C21.1 C38.2 C42.1 C43.1 D3.5 IC1.A2 J4.A4_B9 J4.A9_B4 U1.P$AD2
VREG: C23.2 C24.1 C39.1 IC1.B2 IC9.A1 IC9.A2 IC9.A3 TP_VREG.TP

## Tracks (layer width: path | path; a pad name or v marks a point on that pad's centre or on a via)
3V3  (via drill 0.2, 0.35)
  Top 0.127: 30.65,18.77 30.65,18.07
  Top 0.15: U1.P$Y2 27.34,19.26 U1.P$W1 26.86,19.27 25.22,19.27 24.99,19.05 24.99,18.02 v25.01,18 | v26.85,18.83 27.14,18.83 27.57,19.26 U1.P$Y2 | U1.P$AD14 30.65,18.07 | 30.65,18.77 30.39,19.02 27.84,19.02 27.61,19.26 U1.P$Y2 | R7.2 32.38,6.86 31.44,5.92 v31.44,5.59
  Top 0.152: v20.97,17.8 21.39,17.8 R18.1 | U1.P$AD14 31.14,17.46 31.3,17.46 31.37,17.38 v31.48,17.38 | C7.1 25.02,18 | v21.38,16.5 21.38,16.43 | R5.2 15.03,6.18 17.25,3.96 19.79,3.96 | C34.1 22.81,13.73 20.69,13.15 20.71,13.13 v20.71,13.04 | 23.77,11.34 IC2.C2 23.77,11.32 24.31,11.85 24.57,11.85 24.79,11.63 24.79,11.1 24.54,10.85 v24.54,10.63 | C19.1 20.68,19.03 v19.99,18.34 17.78,18.34 R17.1 | v34.39,21.78 35.21,21.78 C6.1
  Top 0.305: C19.1 20.54,19.03 20.54,19.53 20.1,19.96 IC3.10 | 20.13,21.98 20.35,22.21 22.36,22.21 22.43,22.14 22.43,21.31 22.32,21.2 IC3.3 | 20.13,21.94 20.13,21.98 | v23.75,23.68 24.12,23.32 25.07,23.32 25.66,23.9 C14.1 25.78,24.19 26.76,24.19 26.94,24.01 U1.P$B1 27.09,24.4 27.27,24.58 C12.1 | v25.01,18 25.02,18 | 21.38,16.43 20.95,16 20.95,15.09 TP_3.3V.TP 22.11,13.95 22.11,13.87 | v19.79,3.87 19.79,3.96 R8.2 20.11,4.47 19.88,4.7 19.88,4.71 19.57,5.01 19.39,5.01 19.39,5.78 19.1,6.07 19.1,6.97 21.47,9.34 21.1,9.71 v21.1,10.3 | Q1.2 15.98,18.1 16.6,17.49 16.61,17.5 17.76,17.5 18.04,17.22 18.04,15.9 20.07,13.87 22.11,13.87 | 22.11,13.87 22.88,13.87 C34.1 23.01,13.7 22.7,13.39 22.36,13.39 21.1,12.12 v21.1,11.98 21.23,12.11 v21.99,12.11 | TP_3V3.TP 34.63,28.65 33.15,27.18 33.15,25.67 33.06,25.58 33.06,25.47 32.96,25.38 v32.84,25.38 32.84,24.86 32.59,24.61 U1.P$A22 | J2.1 38.91,15.93 38.66,15.93 38.31,15.57 34.99,15.57 34.56,16 C8.1 34.8,16.63 33.91,17.53 33.84,17.53 33.35,18.03 33.11,18.03 U1.P$AD23 33.09,17.06 v33.57,16.57 | 20.13,21.98 20.1,21.96 IC3.7 19.8,21.7 19.64,21.85 18.32,21.85 17.97,21.5 17.97,21.22 17.62,20.87 R17.1
  Route2 0.152: v23.75,23.68 23.75,21.93 v26.85,18.83 | v20.97,17.8 20.43,18.34 v19.99,18.34 | v20.71,13.04 20.43,12.76 20.43,11.44 v20.31,11.18 | v32.6,17.3 33.32,16.57 v33.57,16.57
  Route2 0.305: v21.1,11.98 21.1,10.36 21.07,10.33 | 21.07,10.33 | 21.07,10.33 v21.1,10.3
  Bottom 0.15: 22.03,12.15 21.76,12.42 21.76,12.99 22.16,13.39 24.47,13.39 25.01,12.85 25.01,12.35 25.38,11.98 26.59,11.98 | v31.44,5.59 30.62,5.59 28.51,7.71 28.51,9.24 26.94,10.8 26.94,11.06 26.74,11.27 26.74,11.34 26.81,11.42 26.81,11.76 26.59,11.98 | 26.59,11.98
  Bottom 0.152: v33.57,16.57 33.87,16.87 33.87,21.25 v34.39,21.78 | 21.38,16.57 21.9,17.09 24.1,17.09 v25.01,18 | 21.38,16.57 v21.38,16.5 | 21.38,16.57 21.38,16.63 20.43,17.58 20.43,17.89 v19.99,18.34 | v31.48,17.38 31.56,17.3 v32.6,17.3 32.66,17.3 | v24.54,10.63 24.44,10.52 23.6,10.52 22.02,12.11 v21.99,12.11
  Bottom 0.305: v34.39,21.78 32.41,23.77 32.41,24.18 33.1,24.87 33.1,25.47 33.06,25.47 32.96,25.38 v32.84,25.38 | 22.03,12.15 v21.99,12.11
ALERT  (via drill 0.2, 0.35)
  Top 0.15: U3.5 25.16,7.04 26.57,8.45 v26.8,8.45 | v33.12,21.54 U1.P$J24
  Route2 0.152: v33.12,21.54 33.21,21.54 35.5,19.25 v35.52,19.25
  Bottom 0.15: v26.8,8.45 26.8,8.33 31.45,3.69 33.11,5.35 33.11,8.82 37.05,8.82 38.47,10.25 38.47,11.1 37.02,12.55 35.8,12.55 34.91,13.43 34.91,18.93
  Bottom 0.152: v35.52,19.25 35.2,18.93 34.91,18.93
D+  (via drill 0.35)
  Top 0.152: D3.4 19.83,24.03 21.12,22.74 v21.89,22.74 | v27.79,17.45 28.03,17.45 U1.P$AD6
  Bottom 0.152: v21.89,22.74 27.19,17.45 v27.79,17.45
D-  (via drill 0.35)
  Top 0.152: D3.6 23.16,24.36 v23.22,24.42 | v27.59,18.57 28.09,18.08 U1.P$AD4
  Route2 0.152: v23.22,24.42 23.73,24.42 24.23,23.92 24.23,23.45 24.57,23.11 26.56,23.11 26.76,22.92 26.76,19.59 27.59,18.75 v27.59,18.57
DEC4_6  (via drill 0.2)
  Top 0.152: U1.P$B5 28.76,24.43 28.76,24.64 29.31,25.19 L3.1 29.9,25.53 C15.1 30.82,26.05 31.41,25.46 | 31.41,25.46 C10.1 30.94,25.35 v30.76,25.17 | C16.1 31.54,25.59 31.41,25.46 | v34.25,25.51 34.25,25.42 34.98,24.69 34.98,23.5 34.49,23.01 U1.P$E24
  Bottom 0.152: v30.76,25.17 31.77,25.17 32.58,25.98 33.31,25.98 33.36,25.94 33.91,25.94 34.25,25.6 v34.25,25.51 | v34.25,25.51
DN
  Top 0.15: D3.1 22.5,27.63 22.56,27.63 J4.A7 22.56,29.95 24.16,31.56 24.88,30.84 23.56,29.52 J4.B7
DP  (via drill 0.35)
  Top 0.15: v22.68,30.89 22.06,30.26 J4.B6 22.06,28.13 v21.88,27.96 | v23.94,30.57 23.06,29.69 J4.A6 | D3.3 18.94,25.98 v18.51,25.98
  Bottom 0.15: v22.68,30.89 22.99,30.57 v23.94,30.57 | v18.51,25.98 19.91,25.98 v21.88,27.96
EPD_3V3  (via drill 0.2, 0.35)
  Top 0.152: J1.16 J1.15 11.64,15.74 12.74,15.74 13.05,16.04 13.06,16.06 13.06,16.67 12.47,17.27 EPD_C5.2 | v13.52,18.25 13.67,18.11 Q1.3
  Top 0.305: C1-EP-DR.1 12.69,30 12.69,27.27 12.86,27.09 13.49,27.09 13.5,27.08 L5.2 14.56,28.06 17.75,24.87 17.75,23.21 16.37,21.82 v16.16,21.82 | Q1.3 13.64,17.12 12.94,17.12 EPD_C5.2
  Bottom 0.305: v16.16,21.82 15.41,21.08 15.41,19.48 14.18,18.25 v13.52,18.25
EPD_BUSY  (via drill 0.35)
  Top 0.152: J1.9 11.56,19.22 v11.99,19.65
  Route2 0.152: v13.13,15.44 13.17,15.39 25.81,15.39 v26.01,15.2 | v27.09,16.41 27.09,14.86 v27.12,14.83
  Bottom 0.152: v11.99,19.65 11.99,18.95 11.66,18.62 11.66,15.36 11.83,15.2 12.89,15.2 v13.13,15.44 | v26.01,15.2 26.21,15.4 27.88,15.4 27.31,14.83 v27.12,14.83 | 30.09,17.8 U1.P$AD12 30.09,17.11 29.4,16.41 v27.09,16.41
  other vias: 30.09,18.01
EPD_DC  (via drill 0.2, 0.35)
  Top 0.152: J1.11 10.22,18.22 v10.09,18.35 | v28.82,18.53 28.82,18.51 29.32,18.01 U1.P$AD10
  Route2 0.152: v10.09,18.35 10.09,18.4 13.87,22.17 v13.97,22.17 | v8.8,32.9 13.61,32.9 20.47,26.04 v22.74,26.04
  Bottom 0.152: v13.97,22.17 13.97,27.73 v8.8,32.9 | v22.74,26.04 26.27,22.51 26.27,18.76 27.02,18.01 27.2,18.01 28.01,18.82 28.54,18.82 v28.82,18.53
EPD_RST  (via drill 0.35)
  Top 0.15: v29.54,17.27 29.91,17.64 29.91,18.43 U1.P$AC11 | v12.27,18.36 12,18.36 11.64,18.72 J1.10
  Route2 0.15: v12.27,18.36 12.72,18.81 20.87,18.81 22.88,16.81 v25.64,16.81
  Bottom 0.15: v29.54,17.27 29.46,17.27 29.06,16.87 25.7,16.87 v25.64,16.81
GDR
  Top 0.152: R2_EP_DR.2 6.65,29.34 7.04,28.95 7.04,28.21 Q3.1 8.48,28.13 9.93,26.67 9.93,23.35 10.56,22.72 J1.2
GND  (via drill 0.2, 0.3, 0.35)
  Top 0.127: C3.2 39.48,25.87 39.5,25.87 39.84,26.21 C4.2
  Top 0.15: 26.86,27.29 26.94,27.22 | R2_USB.2 18.48,27.23 18.48,27.42 19.44,28.38 19.7,28.38 20.78,27.3 D3.2 | C5.2 25.48,24.89 C14.2
  Top 0.152: 13.08,5.76 C30.1 | v14.65,4.84 14,4.84 SW_UP.1 | IC9.B1 IC9.C1 IC9.C2 IC9.C3 32.88,12.48 33.35,12.01 v33.63,12.01 | U1.P$B7 28.84,23.36 U1.P$75 | 22.39,8.72 22.55,8.56 U3.1 22.55,8.88 | U3.4 22.86,7.04 23.53,7.72 U3.9 | U1.P$F23 32.44,22.76 U1.P$78 | IC3.8 20.08,21.23 19.73,21.23 19.49,21.47 18.85,21.47 18.8,21.42 R3.1 | 25.75,6.88 C27.2 | 25.03,6.59 v24.95,6.59 | U3.9 23.78,7.54 | 23.27,11.82 IC2.B3 | 23.85,12.94 24.01,13.11 | C34.2 24.01,13.35 23.31,12.65 v23.28,12.65 | C9.2 34.7,21.11 v35.21,20.6 | U1.P$74 30.34,20.06 U1.P$89 | v35.48,17.07 35.48,16.41 C8.2 | C19.2 21.52,19.03 21.62,19.13 v21.77,19.13 | 24.66,7.4 U3.6 24.49,7.51 23.81,7.51 U3.9 | EPD_C5.1 12.01,17.54 12.01,16.93 v12.05,16.93 | C38.1 26.11,12.18 | 25.51,11.36 C32.2 | R9.1 29.42,11.56 v29.18,11.79 28.54,11.79 IC1.D2 | C37.1 29.06,12.71 v28.94,12.59 | C39.2 28.52,10.4 v29.02,10.4 | 16.39,15.27 16.25,15.27 16.05,15.07 | U3.9 23.53,8.02 | 21.25,8.56 v21.25,8.19 | X1.4 37.13,24.3 37.17,24.34 37.17,24.7 37.63,25.16 v37.63,25.71 | C24.2 34.7,14.77 v35.38,14.77 | v33.8,9.38 33.13,10.05 C33.2 | C20.2 28.14,15.76 v28.69,15.21
  Top 0.305: C30.1 12.7,5.82 | EPD_C12.2 7.81,10.23 | C29.1 40.23,6.58 42.17,8.53 42.18,8.53 44.05,10.4 TP_GND.TP | J2.5 J2.3 40.15,15.86 39.3,15 39.3,13.52 | TP_BAT_GND.TP 42.35,10.46 | C5.2 25.45,25.04 25.45,25.3 25.7,25.55 C42.2 | C10.2 32.02,25.91 32.06,25.94 32.06,26.48 31.82,26.72 C16.2 | J4.SH4 19.03,29.53 J4.A12_B1
  Route2 0.152: v23.28,12.65 23.28,10.25 23.19,10.17 | v33.63,12.01 33.94,11.7 33.94,9.52 v33.8,9.38
  Bottom 0.152: v21.77,19.13 22.13,18.76 22.5,18.76 23.32,17.94 v23.34,17.94
  other vias: 36.46,11.02 37.33,21.39 25.91,17.88 18.5,20.15 22.92,10.27 9.55,15.16 19.29,20.96 25.44,12.69 17.18,6.59 41.73,27.93 41.74,29.16 27.24,27.22 23.98,27.87 41.91,25.79 41.91,25.05 41.87,24.27 42.06,23.47 42.88,23.42 43.68,23.42 44.49,23.42 45.25,23.42 42.75,30.05 43.49,30.05 44.22,30.05 44.97,30.05 42.04,29.84 38.15,6.02 40.61,5.07 40.45,2.93 43.62,4.16 37.9,2.35 3.06,29.2 4.89,32.27 2.42,26.09 30.75,31.67 33.76,33.3 37.46,33.21 40.66,33.01 38.94,30.63 35.43,31.28
  pour Top: 6.43,10.86 6.41,10.84 6.39,10.82 0.1,10.82 0.1,5.82 0.13,5.19 0.25,4.56 0.44,3.96 0.7,3.38 1.03,2.83 1.42,2.33 1.87,1.88 2.37,1.49 2.91,1.16 3.49,0.9 4.1,0.71 4.72,0.6 5.35,0.56 5.36,0.56 5.37,0.56 5.37,0.56 5.38,0.56 9.38,-0.78 9.38,2.03 9.39,2.05 9.41,2.07 9.44,2.09 14.23,2.09 14.26,2.07 14.28,2.05 14.29,2.03 14.29,-0.08 20.6,-0.08 20.6,2.03 20.61,2.05 20.63,2.07 20.66,2.09 25.44,2.09 25.46,2.07 25.48,2.05 25.5,2.03 25.5,-0.12 31.69,-0.12 31.69,2.03 31.71,2.05 31.73,2.07 31.75,2.09 36.53,2.09 36.56,2.07 36.58,2.05 36.59,2.03 36.59,0.15 39.33,0.15 40.09,0.19 40.85,0.33 41.58,0.56 42.28,0.88 42.93,1.27 43.54,1.74 44.08,2.29 44.55,2.89 44.95,3.55 45.26,4.24 45.49,4.98 45.63,5.73 45.68,6.5 45.68,29.94 45.64,30.54 45.53,31.14 45.35,31.72 45.1,32.27 44.79,32.79 44.41,33.26 43.99,33.69 43.51,34.07 42.99,34.38 42.44,34.63 41.86,34.81 41.26,34.92 40.66,34.95 6.37,34.95 5.61,34.91 4.87,34.77 4.15,34.55 3.45,34.24 2.81,33.84 2.21,33.38 1.67,32.84 1.21,32.24 0.81,31.6 0.5,30.9 0.28,30.18 0.14,29.44 0.1,28.68 0.1,23.68 6.39,23.68 6.41,23.66 6.43,23.64 6.45,23.62 6.45,10.88
  pour Bottom: 25.48,2.05 25.5,2.03 25.5,-0.2 31.69,-0.2 31.69,2.03 31.71,2.05 31.73,2.07 31.75,2.09 36.57,2.09 36.6,2.07 36.62,2.05 36.63,2.03 36.63,0.07 37.99,0.07 38.85,0.11 39.7,0.26 40.53,0.5 41.32,0.82 42.08,1.24 42.78,1.74 43.42,2.31 43.99,2.95 44.49,3.65 44.9,4.41 45.23,5.2 45.47,6.03 45.62,6.87 45.66,7.74 45.66,29.95 45.63,30.55 45.52,31.15 45.34,31.72 45.09,32.28 44.78,32.79 44.41,33.27 43.98,33.7 43.5,34.07 42.99,34.38 42.43,34.63 41.86,34.81 41.26,34.92 40.66,34.95 6.37,34.95 5.61,34.91 4.87,34.77 4.15,34.55 3.45,34.24 2.81,33.84 2.21,33.38 1.67,32.84 1.21,32.24 0.81,31.6 0.5,30.9 0.28,30.18 0.14,29.44 0.1,28.68 0.1,23.68 6.39,23.68 6.41,23.66 6.43,23.64 6.45,23.62 6.45,10.88 6.43,10.86 6.41,10.84 6.39,10.82 0.1,10.82 0.1,7.65 0.14,6.8 0.29,5.96 0.52,5.14 0.85,4.36 1.26,3.61 1.75,2.92 2.32,2.29 2.95,1.72 3.65,1.23 4.39,0.81 5.18,0.49 6,0.25 6.83,0.11 7.69,0.06 8.83,0.06 8.83,2.03 8.85,2.05 8.87,2.07 8.89,2.09 14.25,2.09 14.28,2.07 14.3,2.05 14.32,2.03 14.32,0 20.26,0 20.26,2.03 20.28,2.05 20.3,2.07 20.32,2.09 25.44,2.09 25.46,2.07
  pour Route2: 0.56,-3.16 46.61,-3.16 46.78,-3.14 46.94,-3.09 47.09,-3.01 47.21,-2.91 47.32,-2.78 47.4,-2.64 47.45,-2.48 47.46,-2.31 47.46,32.74 47.43,33.1 47.35,33.44 47.21,33.78 47.03,34.08 46.79,34.35 46.52,34.59 46.22,34.77 45.89,34.91 45.54,34.99 45.18,35.02 -0.8,35.02 -0.8,-1.79 -0.78,-2.03 -0.72,-2.26 -0.62,-2.48 -0.48,-2.67 -0.32,-2.84 -0.12,-2.97 0.09,-3.07 0.32,-3.14
LX1
  Top 0.152: IC9.B2 IC9.B3 33.45,12.88 34.18,12.15 37.3,12.15 38.7,10.75 L7.1
LX2
  Top 0.152: IC9.D2 IC9.D3 32.83,12.01 32.91,12.01 34.08,10.84 34.08,10.24 35.92,8.4 39.7,8.4 40.76,9.46 L7.2
MOSI  (via drill 0.2, 0.35)
  Top 0.152: J1.14 11.29,16.59 11.81,16.59 12.01,16.38 v12.59,16.38 | v30.35,24.72 30.34,24.7 U1.P$B13
  Route2 0.152: v12.59,16.38 12.47,16.27 9.36,16.27 8.51,15.42 7.95,15.99 7.95,22.08 15.81,29.94 20.29,25.47 30.35,25.47 v30.35,24.72
N$2
  Top 0.152: IC9.D1 31.9,12.14 31.66,12.14 31,12.8 R4.2
N$3  (via drill 0.35)
  other vias: 36.32,16.81
N$4
  Top 0.152: IC9.E1 31.95,11.65 R2.2
N$5
  Top 0.152: C25.1 31.93,10.76 | 31.93,10.76 32.9,10.76 32.9,11.54 IC9.E3 IC9.E2 | 31.93,10.76 C33.1
N$7
  Top 0.152: R9.2 28.89,11.01 27.36,12.53 IC1.D1
N$8  (via drill 0.2, 0.35)
  Top 0.152: C5.1 26.1,25.01 26.26,24.85 26.53,24.85 26.53,25.92 v26.5,25.96 | v26.51,23.58 27.02,23.58 U1.P$C1
  Bottom 0.152: v26.5,25.96 26.5,23.59 v26.51,23.58
N$9
  Top 0.152: U1.P$B3 27.84,25.01 27.72,25.13 27.72,25.95 L2.2
N$10  (via drill 0.2)
  Top 0.152: R3.2 v19.32,20.18 | v22.47,19.83 22.06,19.83 21.69,20.2 IC3.1
  Route2 0.152: v19.32,20.18 22.12,20.18 v22.47,19.83
N$11
  Top 0.152: L2.1 L3.2
N$23  (via drill 0.35)
  Top 0.152: C11.1 34.22,26.88 34.22,27.04 34.44,27.26 v35.66,27.26 | v33.05,23.94 33.05,23.29 U1.P$D23
  Bottom 0.152: v35.66,27.26 35.19,26.79 35.19,25.7 34.47,24.98 34.23,24.98 33.92,24.67 33.92,24.18 33.68,23.94 v33.05,23.94
N$26  (via drill 0.2, 0.35)
  Top 0.152: C20.1 28.6,17.32 v28.79,17.32 | U1.P$AC5 v28.34,18.43
  Bottom 0.152: v28.34,18.43 28.34,17.78 v28.79,17.32
N$27
  Top 0.152: C9.1 34,20.6 U1.P$N24
N$29  (via drill 0.2)
  Top 0.152: C2.1 39.42,24.3 X1.3 38.15,26.38 37.09,26.38 36.22,25.51 v36.22,25.37 | U1.P$A23 34.39,24.51 v34.45,24.45
  Bottom 0.152: v34.45,24.45 35.37,25.37 v36.22,25.37
N$30  (via drill 0.2)
  Top 0.152: 36.34,23.03 36.34,22.1 38.33,22.1 38.9,22.68 C1.1 | X1.1 36.7,23.03 36.34,23.03 | U1.P$B24 33.91,24.01 v34.32,23.59 | v35.48,22.54 35.96,23.03 36.34,23.03
  Bottom 0.152: v35.48,22.54 35.37,22.54 v34.32,23.59
N$31
  Top 0.127: L1.1 38.16,27.94 37.69,27.46 C3.1
  Top 0.152: 37.64,27.15 C3.1 36.77,27.15 35.44,25.82 35.44,23.53 34.51,22.6 33.43,22.6 U1.P$H23
N$32  (via drill 0.2, 0.35)
  Top 0.152: D4.2 7.22,3.04 7.1,3.04 6.3,3.84 3.71,3.84 2.26,5.29 2.26,5.32 2.5,5.56 2.5,5.36 D2.1 3.19,6.05 8.87,6.04 13.42,10.59 v13.42,10.77 | C2-EP-DR.1 8.53,29.49 v8.53,30.98
  Bottom 0.152: v8.53,30.98 7.47,29.93 7.47,18.46 13.42,12.51 v13.42,10.77
N$33  (via drill 0.2, 0.35)
  Top 0.152: L5.1 13.32,23.49 10.54,26.26 10.54,27.53 Q3.3 | C2-EP-DR.2 10.63,27.62 Q3.3 | Q3.3 11.44,28.42 11.44,30.94 v11.53,31.03 | 19.62,9.2 v19.62,8.98 v18.65,8.01 | D5.2 6.38,7.79 v6.45,7.87
  Bottom 0.152: v19.62,8.98 19.39,9.21 19.39,17.88 17.97,19.29 17.97,24.59 v11.53,31.03 | v6.45,7.87 7.07,7.25 17.89,7.25 v18.65,8.01
N$34
  Top 0.152: R1_EP_DR.2 6.33,27.47 7.63,26.16 7.72,26.16 Q3.2
N$35  (via drill 0.35)
  Top 0.152: R1_EP_DR.1 7,25.83 7,25.76 v6.72,25.48 | 17.13,15.91 R_TYPE_SEL.2 | 17.13,15.91 18.67,14.37 SJ1.2 | v17.46,16.97 17.55,16.88 17.55,16.32 17.13,15.91
  Route2 0.152: v6.72,25.48 8.21,25.48 v8.28,25.55
  Bottom 0.152: v17.46,16.97 16.5,16.97 15.23,15.7 14.16,16.77 13.43,16.77 12.99,17.21 12.99,19.32 9.25,23.06 9.25,28.86 9.04,29.07 8.04,29.07 8.04,26.8 8.28,26.55 v8.28,25.55
N$37
  Top 0.152: EPD_C1.1 13.26,19.44 11.6,21.1 11.28,21.1 J1.5
N$38  (via drill 0.35)
  Top 0.152: C32.1 25.84,9.91 v25.84,9.57 | IC2.A2 22.01,10.52 v22.01,9.98 22.55,9.98 22.7,9.83 23.3,9.83 23.75,9.39 v24.54,9.39
  Bottom 0.152: v25.84,9.57 25.66,9.39 v24.54,9.39
N$39
  Top 0.152: EPD_C6.1 11.71,14.95 11.48,14.72 J1.18
N$40
  Top 0.152: EPD_C7.1 13.32,14.22 J1.19
N$41
  Top 0.152: J1.4 11.28,21.6 11.6,21.6 12.54,20.67 EPD_C2.1
N$42
  Top 0.152: EPD_C8.1 15.74,9.06 15.74,10.77 12.79,13.72 J1.20
N$43
  Top 0.15: R1_USB.2 23.02,27.15 23.02,26.52 23.12,26.42 24.41,26.42 24.66,26.67 24.66,27.83 24.06,28.43 J4.A5
N$44
  Top 0.152: J1.22 11.3,12.57 12.92,12.57 14.27,11.22 14.27,10.37 EPD_C10.1
N$46
  Top 0.152: EPD_C12.1 8.93,9.42 11.16,11.65 J1.24
N$47  (via drill 0.35)
  other vias: 18.85,19.28
N$48  (via drill 0.2)
  other vias: 13.47,16.08
N$50
  Top 0.15: J4.B5 21.06,31.76 18.49,31.76 17.45,30.73 17.45,27.44 18.17,26.72 18.81,26.72 18.81,27.01 R2_USB.1
OUT+  (via drill 0.2, 0.35)
  Top 0.305: IC2.A3 22.77,12.12 22.43,12.46 22.44,12.48 v22.44,12.7 | v27.31,5.99 29.75,3.54 TP_OP.TP
  Bottom 0.15: v22.44,12.7 23.09,12.05 | 23.09,12.05 23.25,11.9 | 27.31,6.2 26.34,7.17 26.34,9.83 26.24,9.83 24.81,11.26 24.81,11.64 24.4,12.05 23.09,12.05
  Bottom 0.305: v27.31,5.99 27.31,6.2
OUT-  (via drill 0.2, 0.35)
  Top 0.152: TP_ON.TP 31.31,9.6 v28.83,9.6 | IC2.C3 23.77,11.91 24.54,12.68 v24.54,12.72
  Route2 0.152: 24.58,12.68 v24.54,12.72 | v28.83,9.6 27.7,9.6 v27.58,9.48
  Bottom 0.15: v24.54,12.72 24.7,12.56 24.7,12.18 25.41,11.46 25.5,11.46 25.81,11.15 25.81,10.79 27.13,9.48 v27.58,9.48
P0.00/XL1
  Top 0.152: U1.P$D2 27.3,23.26 27.22,23.18 26.86,23.18 26.7,23.01 25.86,23.01 X2.1 23.97,22.54 C17.2
P0.01/XL2
  Top 0.152: U1.P$F2 27.51,22.84 26.95,22.84 26.76,22.64 26.76,21.41 X2.2 24.5,20.92 C18.2
P0.13  (via drill 0.35)
  Top 0.152: SW_UP.2 10.61,5.82 10.62,5.82 10.96,6.17 11.1,6.17 11.44,5.82 C30.2 12.08,5.28 12.19,5.17 13.97,5.17 14.08,5.28 R5.1 14.81,5.63 17.24,3.19 v17.24,2.64
  Route2 0.15: U1.P$AD8 29.09,18.78 29.2,18.89 29.53,18.89 30.35,18.07 30.4,16.69 30.85,16.24 31.19,16.24
  Route2 0.152: v17.24,2.64 20.57,5.96 26.68,5.96 28.93,8.21 v29.03,8.21 | v30.65,8.72 34.39,8.72 34.48,8.82 34.48,12.93 v34.44,12.93 | v31.19,14.8 31.19,16.24
  Bottom 0.152: v29.03,8.21 30.14,8.21 v30.65,8.72 | v34.44,12.93 34.44,13.46 33.1,14.8 v31.19,14.8
  other vias: 29.09,18.01
P0.14  (via drill 0.2, 0.35)
  Top 0.15: C31.2 26.23,4.71 v26.23,4.08
  Top 0.305: R8.1 21,5.02 SW_ENT.2 21.67,5.07 22.07,5.47 25.47,5.47 C31.2 | U1.P$AC9 v29.37,18.51
  Route2 0.15: v26.23,4.08 30.15,8.01 30.15,9.72 30.52,10.09 30.52,14.52 30.5,14.54 30.48,14.54 30.02,15 30.02,17.51 29.94,17.51 29.57,17.88 29.57,18.3 v29.37,18.5 v29.37,18.51
P1.01  (via drill 0.2, 0.35)
  Top 0.15: U1.P$Y23 33.09,18.59 v33.07,18.58 | v19.9,15.95 18.75,15.95 v18.63,16.08 | v16.72,14.76 16.27,14.31 16.04,14.31 15.77,14.58 Q1.1
  Top 0.152: v16.09,17.23 16.09,16.53 Q1.1 | v16.82,19.47 16.9,19.39 R_PWR_EPD.1
  Bottom 0.15: v33.07,18.58 33.14,18.51 33.14,17.18 31.69,15.72 20.13,15.72 v19.9,15.95 | v18.63,16.08 17.31,14.76 v16.72,14.76
  Bottom 0.305: v16.82,19.47 16.82,17.53 16.75,17.45 16.29,17.45 16.09,17.26 v16.09,17.23
P1.02  (via drill 0.35)
  Top 0.15: SW_DN.2 32.6,6.15 R7.1 33.58,6.3 C29.2
  Top 0.152: U1.P$W24 34.13,19.51 v34.34,19.72 | v34.54,7.78 34.54,7.27 C29.2
  Top 0.305: 32.6,4.35 SW_DN.2
  Route2 0.152: v34.22,16.46 35.39,15.29 35.89,15.29 35.89,7.78 v34.54,7.78
  Bottom 0.152: v34.34,19.72 34.34,16.57 v34.22,16.46
PREVGH  (via drill 0.35)
  Top 0.152: J1.21 11.23,13.15 11.43,13.15 11.48,13.1 12.13,13.1 v12.19,13.05 | D5.1 3.39,9.38 6.2,9.38 7.38,8.2 EPD_C9.1 7.4,6.99 8.62,8.2 v8.68,8.2
  Route2 0.152: v11.95,7.75 13.56,7.75 14.4,8.58 14.4,12.37 13.72,13.05 v12.19,13.05
  Bottom 0.152: v8.68,8.2 11.49,8.2 v11.95,7.75
PREVGL  (via drill 0.35)
  Top 0.152: EPD_C11.1 9.96,9.59 v10.56,10.19 | v12.72,11.2 12.72,11.92 12.42,12.22 J1.23 | v9.43,4.83 8.97,4.37 6.86,4.37 D2.2
  Route2 0.152: v12.72,11.2 9.43,7.91 v9.43,4.83
  Bottom 0.152: v12.72,11.2 12.23,11.2 11.23,10.19 v10.56,10.19
RESET  (via drill 0.2, 0.35)
  Top 0.152: 29.88,15.89 TP_RESET.TP 29.88,15.98 30.78,16.88 v31.03,16.88 30.28,17.63 30.28,18.45 U1.P$AC13 | v43.5,19.19 43.47,19.19 43.06,18.78 42.77,18.78 41.52,17.54 J2.6
  Route2 0.152: v31.03,16.88 31.03,17.53 31.27,17.76 34.36,17.76 34.63,17.49 41.57,17.49 43.31,19.22 43.47,19.22 v43.5,19.19
RF
  Top 0.152: ANT1.1 44,28.48 L1.2 38.93,28.25 38.93,27.13 C4.1 39.33,27.35 39.59,27.61 40.74,27.61 41.12,27.23 C22.1
SCK  (via drill 0.2, 0.35)
  Top 0.15: J1.13 11.02,17.08 v10.04,17.08 | v29.91,25.09 29.81,24.98 29.81,24.78 U1.P$A12
  Route2 0.15: v10.04,17.08 10.07,17.08 18.14,25.15 29.85,25.15 v29.91,25.09
SCL  (via drill 0.35)
  Top 0.152: 21.13,20.08 IC3.12 21.13,19.94 21.54,19.53 21.98,19.53 22.29,19.23 22.29,18.4 v22.15,18.27 | U3.7 25.13,8.04 25.42,8.32 25.42,9.01 | IC2.C1 23.78,10.72 | IC2.C1 23.78,10.1 v23.96,9.92 | v20.22,9.54 19.38,9.54 TP_SCL.TP 20,11.94 v20,13.14 | v18.5,17.82 18.4,17.93 17.64,17.93 R17.2 | 25.42,9.01 25.93,9.01 26.34,9.42 26.34,10.83 v26.4,10.88 | IC2.C1 23.78,10.75 24.54,9.98 24.64,9.98 25.42,9.2 25.42,9.01 | v22.42,16.25 22.57,16.1 v22.57,14.78
  Top 0.305: v26.88,13.38 IC1.B1
  Route2 0.152: v18.5,17.82 19.05,17.27 v19.91,17.27 21.32,17.27 22.35,16.25 v22.42,16.25 | v20,13.14 20.62,13.76 21.93,13.76 22.57,14.4 v22.57,14.78 | v26.4,10.88 26.73,11.22 26.73,11.78 27.06,12.11 27.06,13.2 v26.88,13.38
  Bottom 0.152: v22.15,18.27 20.86,18.27 19.96,19.17 19.88,19.17 19.3,18.59 19.3,18.37 19.98,17.69 19.98,17.34 v19.91,17.27 | v22.57,14.78 22.42,14.93 | v20.22,9.54 20.26,9.51 21.94,9.51 22.09,9.37 22.23,9.37 22.72,9.85 23.91,9.85 v23.96,9.92
SDA  (via drill 0.2, 0.35)
  Top 0.152: v25.38,14.58 25.38,15.69 25.06,16.01 TP_SDA.TP 23.58,16.01 22.16,17.43 R18.2 22.26,17.59 22.68,18 22.68,19.04 23.06,19.42 23.06,20.12 22.54,20.65 21.71,20.65 IC3.2 | v26.33,11.57 26.64,11.87 26.85,11.87 26.98,12.01 26.98,12.67 27.18,12.86 27.29,12.98 IC1.C1 | IC2.B2 23.51,11.05 24,11.05 24.37,11.42 24.37,11.41 v24.41,11.37 | v22.91,9.29 23.43,9.29 24.18,8.54 U3.8
  Route2 0.152: v25.38,14.58 25.38,13.73 25.2,13.55 v25.2,13.36 25.16,13.36 25.03,13.23 25.03,12.38 25.38,12.03 25.87,12.03 v26.33,11.57 26.14,11.37 v24.41,11.37 24.41,11.25 22.93,9.32 v22.91,9.29
SWDCLK
  Top 0.152: 40.07,20.72 39.3,19.96 39.3,18.39 40.25,17.45 J2.4 | 40.07,20.72 40.24,20.89 36.36,20.89 34.47,19.01 U1.P$AA24 | TP_SWDCLK.TP 41.5,22.05 40.17,20.72 40.07,20.72
SWDIO  (via drill 0.35)
  Top 0.152: TP_SWDIO.TP 44.56,21.34 | J2.2 39.64,16.46 40.3,16.46 40.3,16.47 43.5,16.47 44.56,17.52 TP_SWDIO.TP | TP_SWDIO.TP 43.54,20.84 v43.06,20.84 | v35.47,18.32 35.28,18.51 U1.P$AC24
  Route2 0.152: v43.06,20.84 43.01,20.79 37.23,20.79 36.08,19.63 36.08,18.93 v35.47,18.32
SWO
  Top 0.152: TP_SWO.TP 32.1,16.02 32.1,17.52 U1.P$AD22
VBAT  (via drill 0.2, 0.35)
  Top 0.15: C27.1 26.31,6.44 v27.05,7.18
  Top 0.152: v29.76,12.73 29.76,12.68 29.27,12.2 28.6,12.2 27.81,12.98 IC1.C2 | TP_VBAT.TP 27.17,3.13 v28.03,3.99
  Top 0.305: v29.99,14.33 29.91,14.41 C37.2 | C27.1 25.67,6.44 25.2,5.98 24.7,5.98 24.37,6.31 20.61,6.31 20.21,6.71 21.03,7.54 U3.3 U3.2
  Route2 0.152: v28.03,3.99 29.65,3.99 v29.98,4.32 31.45,4.32 v31.51,4.39
  Bottom 0.15: v27.05,7.18 29.95,4.27 29.98,4.27 | 32,5.22 32,8.54 29.76,10.78 v29.76,12.73
  Bottom 0.152: v29.99,14.33 v29.98,14.32 29.98,12.96 v29.76,12.73 | v29.98,4.32 29.98,4.27 | v31.51,4.39 v31.52,4.39 31.52,4.74 32,5.22
VBUS  (via drill 0.2, 0.35)
  Top 0.15: 25.01,28.76 J4.A4_B9 25.21,27.32 C43.1 | v20.4,31.1 20.66,30.84 20.66,29.21 J4.A9_B4 | v24.28,25.94 24.36,25.94 25.24,26.81 C43.1 | C42.1 25.19,27.25 C43.1 | C21.1 24.2,19.02 v23.74,19.48 | v22.72,23.46 20.92,23.46 20.78,23.6 D3.5
  Top 0.305: v26.52,14.46 26.37,14.31 26.37,13.68 C38.2 | C21.1 24.2,17.84 24.7,17.34 26.45,17.34 27.06,17.95 27.53,17.95 U1.P$AD2 27.55,18.01 26.14,16.59 27.93,14.81 v27.95,14.81 27.75,14.62 IC1.A2 | D3.5 21.12,24.71 21.12,25.09 21.3,25.27 24.29,25.27 v24.29,25.93 v24.28,25.94
  Route2 0.15: v23.74,19.48 23.74,19.89 22.72,20.9 v22.72,23.46
  Bottom 0.15: v24.28,25.94 24.58,26.24 24.58,26.56 20.4,30.74 v20.4,31.1
  Bottom 0.305: v26.52,14.46 26.77,14.21 27.35,14.21 v27.95,14.81
VRE  (via drill 0.35)
  Route2 0.305: 31.95,13.32 31.62,13.64 31.62,14.2 32.02,14.6 32.38,14.6 v33.67,15.89
VREG  (via drill 0.35)
  Top 0.152: IC9.A2 32.31,13.34 v32.31,13.91 | IC9.A2 IC9.A3 | IC9.A2 IC9.A1 | IC1.B2 28.16,13.38 v28.28,13.26
  Top 0.305: C24.1 33.49,14.73 33.96,15.2 v34.26,15.2 | C23.2 31.85,13.91 v32.31,13.91 | v27.33,11.61 27.33,11.52 27.17,11.36 C39.1 27.17,9.99 26.74,9.56 29.32,6.98 TP_VREG.TP | v33.51,13.72 33.06,13.27 IC9.A3
  Route2 0.305: v33.51,13.72 33.51,14.15 33.93,14.57 33.93,14.86 v34.26,15.2
  Bottom 0.15: 27.91,13.45 27.91,13.11 27.28,12.48 27.28,11.67 v27.33,11.61
  Bottom 0.152: 27.91,13.45 29.4,14.94 30.24,14.94 31.27,13.91 v32.31,13.91 | v28.28,13.26 27.33,12.3 v27.33,11.61
(copper drawn outside any net)
  shapes: Bottom area x2, Route2 area x1, Top area x2